# Altium PCB Acorn_AudioHybrid.pcbdoc
Units mm, origin at the board's own origin, x right, y up, seen from the top; angles counter-clockwise.
Board outline 48.26 x 12.45 mm, 2 copper layers (TopLayer, BottomLayer), stack 1.072 mm thick; 45 components, 29 nets, 121 pads, 21 vias.
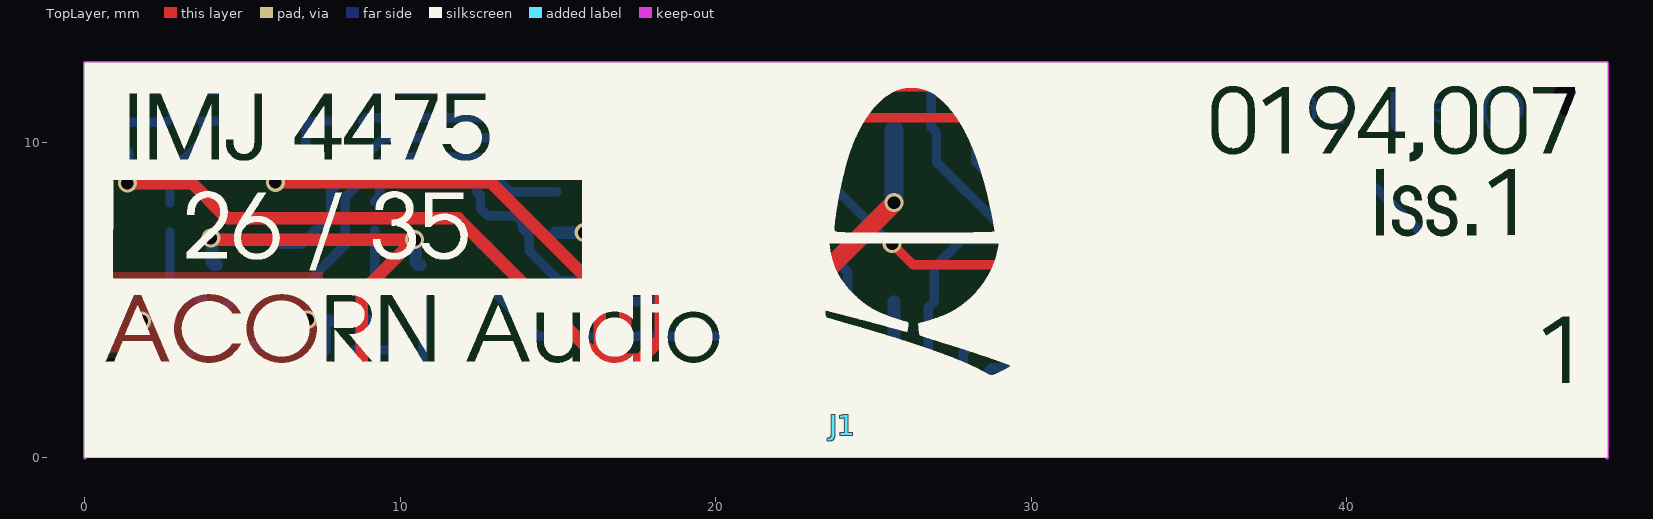
[diagram p0: TopLayer view]
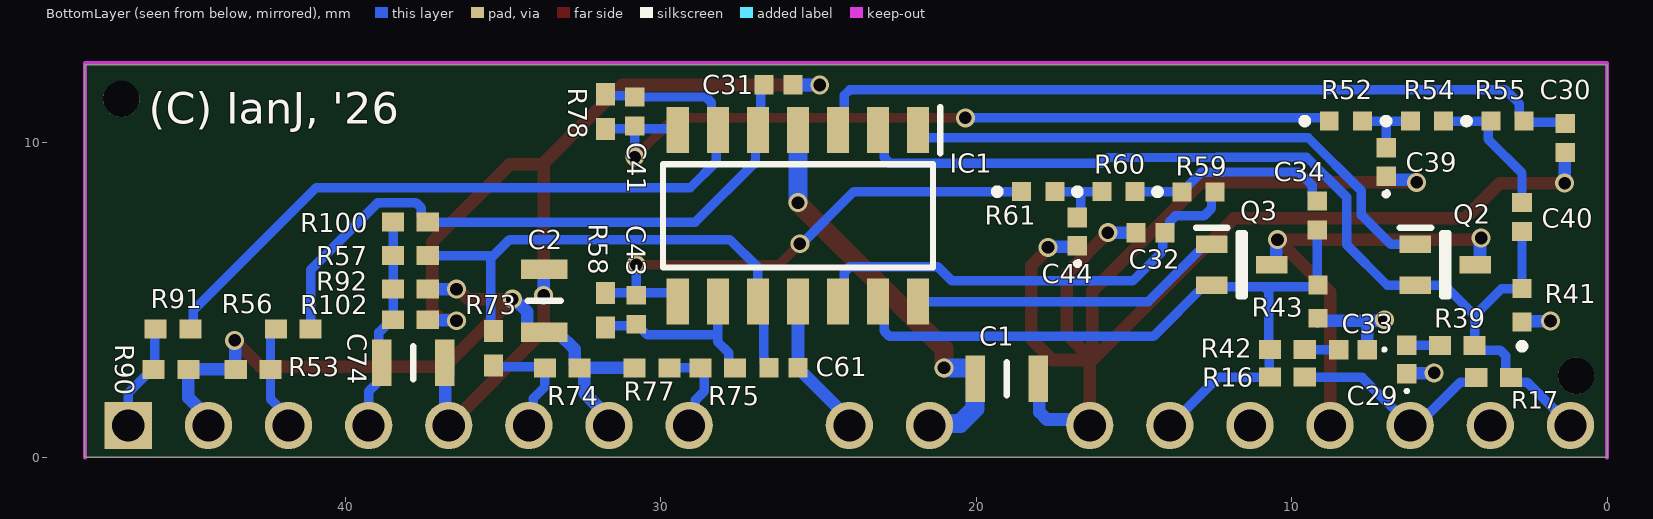
[diagram p1: BottomLayer view, seen from below]
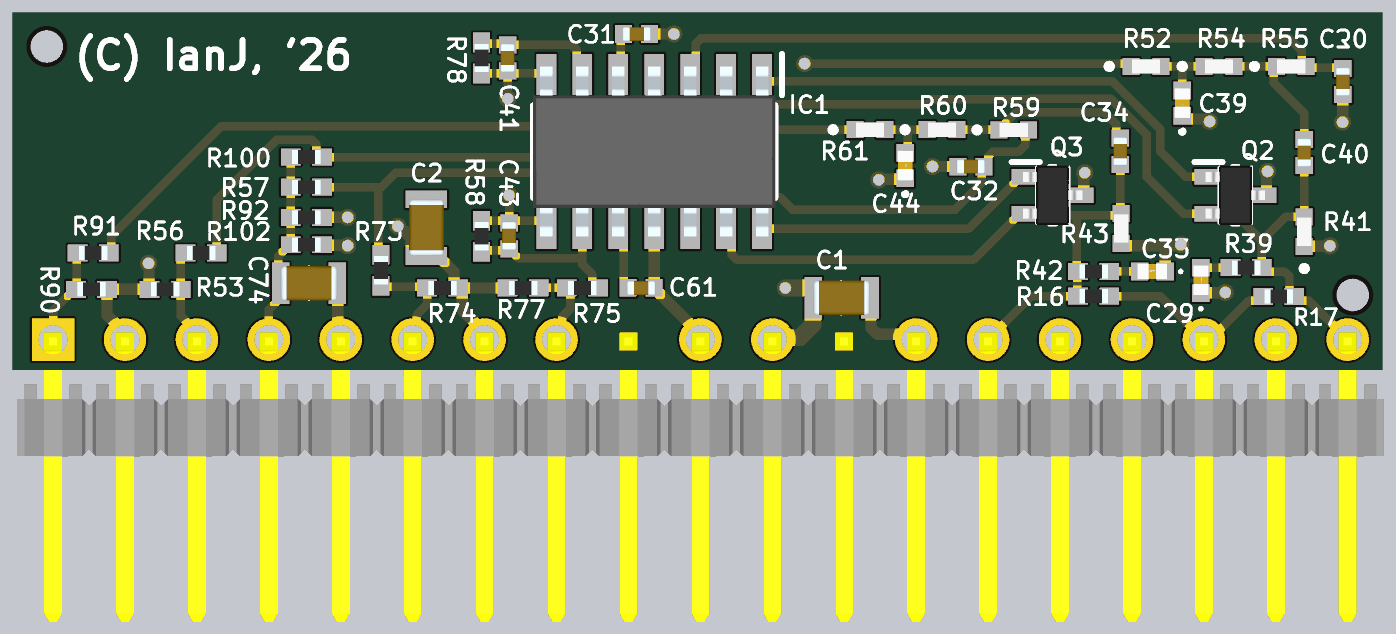
[diagram p2: 3D render of the assembled board from below, using the file's embedded part models]

## Layer stack, top to bottom
TopSolder: solder mask 0.01, Solder Resist, Dk 3.5
TopLayer: signal copper 0.036
Dielectric 2: core 1, Core-043, Dk 4.3
BottomLayer: signal copper 0.036
BottomSolder: solder mask 0.01, Solder Resist, Dk 3.5

## Board outline
0,12.446 0,0 48.26,0 48.26,12.446

## Design rules (kind name [scope] priority, off if disabled: settings)
BoardOutlineClearance [All] p1: gap=0.3 ignorepadtopadclearanceinfootprint=FALSE
Clearance [All] p1: gap=0.17 ignorepadtopadclearanceinfootprint=FALSE except(0.3: Via-Via; 0.5: Via-Hole)
ComponentClearance ComponentClearance_Z2_Z3 [(InComponent('Z2') OR InComponent('Z3')) vs InComponent('No Component')] p1: gap=0 collisioncheckmode=3 verticalgap=0 showdistances=FALSE
ComponentClearance ComponentClearance_U4_J104 [All] p2: gap=0 collisioncheckmode=3 verticalgap=0 showdistances=FALSE
ComponentClearance ComponentClearance_J3_J4 [InComponent('J3') vs InComponent('J4')] p3: gap=0 collisioncheckmode=3 verticalgap=0 showdistances=FALSE
ComponentClearance ComponentClearance_J103_J104 [InComponent('J103') vs InComponent('J104')] p4: gap=0 collisioncheckmode=3 verticalgap=0 showdistances=FALSE
ComponentClearance [All] p5: gap=0.254 collisioncheckmode=3 verticalgap=0.254 showdistances=FALSE
DiffPairsRouting [InDifferentialPairClass('All Differential Pairs')] p1: maxlimit=0.254 minlimit=0.17 mostfreqgap=0.17 toplayer_minwidth=0.2 toplayer_maxwidth=0.381 toplayer_prefwidth=0.237 bottomlayer_minwidth=0.2 bottomlayer_maxwidth=0.381 bottomlayer_prefwidth=0.237 maxuncoupledlength=12.7
FabricationTestPointUsage TestPointUsage [All] p1: valid=0 allowmultiple=FALSE
FabricationTestpoint Testpoint [All] p1: side=3 testpointundercomponent=TRUE minsize=1.016 maxsize=2.54 preferedsize=1.524 minholesize=0.508 maxholesize=1.016 preferedholesize=0.813 testpointgrid=0.025 allowsidetop=TRUE allowsidebottom=TRUE usegrid=TRUE gridtolerance=0
HoleSize [All] p1: absolutevalues=TRUE maxlimit=5 minlimit=0.4 maxpercent=80.000 minpercent=20.000
HoleToHoleClearance [All] p1: gap=0.25 allowstackedmicrovias=FALSE
MinimumSolderMaskSliver [All] p1: minsoldermaskwidth=0.02
PlaneClearance [All] p1: clearance=0.2
PlaneConnect [All] p1: pad.planeconnectstyle=Relief pad.reliefexpansion=0.508 pad.reliefentries=4 pad.reliefconductorwidth=0.254 pad.reliefairgap=0.254 via.planeconnectstyle=Direct via.reliefexpansion=0.508 via.reliefentries=4 via.reliefconductorwidth=0.254 via.reliefairgap=0.254
PolygonConnect [All] p1: thpad.connectstyle=Relief thpad.reliefconductorwidth=0.254 thpad.reliefentries=4 thpad.polygonreliefangle="90 Angle" thpad.airgapwidth=0.254 smdpad.connectstyle=Relief smdpad.reliefconductorwidth=0.254 smdpad.reliefentries=4 smdpad.polygonreliefangle="90 Angle" smdpad.airgapwidth=0.254 via.connectstyle=Direct via.reliefconductorwidth=0.254 via.reliefentries=4 via.polygonreliefangle="90 Angle" via.airgapwidth=0.254
RoutingVias [All] p1: holewidth=0.4 width=0.8 viastyle="Through Hole" minholewidth=0.4 minwidth=0.6 maxholewidth=0.4 maxwidth=0.8
SilkToSilkClearance [All] p1: silktosilkclearance=0.1
SilkToSolderMaskClearance SilkscreenOverComponentPads [IsPad] p1: minsilkscreentomaskgap=0.1 clearancetoexposedcopper=TRUE
SolderMaskExpansion [All] p1: expansion=0.075 istentingtop=FALSE
SupplyNets "Schematic Supply Nets_5" [InNet('GND5')] p1: voltage=0.000
SupplyNets "Schematic Supply Nets_4" [InNet('VCC12')] p2: voltage=0.000
SupplyNets "Schematic Supply Nets_3" [InNet('GND')] p3: voltage=0.000
SupplyNets "Schematic Supply Nets_2" [InNet('VCC5')] p4: voltage=0.000
SupplyNets "Schematic Supply Nets_1" [InNet('VCC')] p5: voltage=0.000
SupplyNets "Schematic Supply Nets" [InNet('Bias')] p6: voltage=0.000
Width [All] p1: maxlimit=5 minlimit=0.15 preferedwidth=0.2
19 further rules are at their usual default settings.

## Components (designator, comment, footprint, x,y, rotation, side; value= is the part's Value field where it differs from the comment)
C1 "33nF" CAPC2012X145N 19.035,2.494 r0 bottom
C2 "33nF" CAPC2012X145N 33.7,4.968 r270 bottom
C29 "47nF" C0402C104J4RACTU 6.35,3.106 r90 bottom
C30 "2n2" CAPC1005X55N 1.334,10.124 r90 bottom
C31 "2n2" CAPC1005X55N 26.274,11.809 r0 bottom
C32 "2n2" CAPC1005X55N 14.472,7.128 r180 bottom
C33 "47nF" C0402C104J4RACTU 8.061,3.422 r0 bottom
C34 "100nF" CAPC1005X55N 9.196,7.668 r270 bottom
C39 "22nF" C0402 7.01,9.364 r90 bottom
C40 "100nF" CAPC1005X55N 2.699,7.62 r270 bottom
C41 "2n2" CAPC1005X55N 30.832,10.964 r270 bottom
C43 "2n2" CAPC1005X55N 30.782,4.682 r90 bottom
C44 "22nF" C0402 16.794,7.158 r90 bottom
C61 "2n2" CAPC1005X55N 26.114,2.84 r0 bottom
C74 "33nF" CAPC2012X145N 37.846,3.005 r0 bottom
IC1 "LM324M" SOIC127P600X180-14N 25.654,7.658 r270 bottom value=LM324
J1 "TSW-119-08-L-S-RA" *SAMTEC_TSW-119-08-L-S-RA_TSW-119-08-L-S-RA(Primary) 46.884,1.016 r0 top
Q2 "BC849CW" SOT65P210X110-3N 5.13,6.112 r180 bottom
Q3 "BC849CW" SOT65P210X110-3N 11.586,6.112 r180 bottom
R16 "4k7" RESC1005X40N 10.136,2.548 r180 bottom
R17 "4k7" RESC1005X40N 3.599,2.54 r180 bottom
R39 "33R" RESC1005X40N 4.749,3.556 r180 bottom
R41 "56R" CRCW0402200KFKED 2.699,4.826 r90 bottom
R42 "33R" RESC1005X40N 10.136,3.422 r0 bottom
R43 "56R" CRCW0402200KFKED 9.163,4.939 r90 bottom
R52 "3K3" CRCW0402200KFKED 8.286,10.664 r180 bottom
R53 "1K" RESC1005X40N 42.926,2.794 r0 bottom
R54 "3K3" CRCW0402200KFKED 5.71,10.664 r180 bottom
R55 "3K3" CRCW0402200KFKED 3.159,10.664 r180 bottom
R56 "22k1" RESC1005X40N 41.656,4.076 r180 bottom
R57 "22k1" RESC1005X40N 37.94,6.398 r180 bottom
R58 "22k1" RESC1005X40N 31.75,4.666 r270 bottom
R59 "3K3" CRCW0402200KFKED 12.955,8.42 r180 bottom
R60 "3K3" CRCW0402200KFKED 15.494,8.428 r180 bottom
R61 "3K3" CRCW0402200KFKED 18.035,8.428 r180 bottom
R73 "22k1" RESC1005X40N 35.306,3.465 r90 bottom
R74 "1K" RESC1005X40N 33.128,2.84 r180 bottom
R75 "22k1" RESC1005X40N 28.194,2.84 r180 bottom
R77 "1K" RESC1005X40N 30.282,2.84 r0 bottom
R78 "22k1" RESC1005X40N 31.75,10.964 r90 bottom
R90 "1K" RESC1005X40N 45.528,2.794 r180 bottom
R91 "22k1" RESC1005X40N 45.466,4.076 r180 bottom
R92 "4K3" RESC1005X40N 37.94,5.334 r180 bottom
R100 "22k1" RESC1005X40N 37.94,7.462 r180 bottom
R102 "22k1" RESC1005X40N 37.94,4.366 r180 bottom

## Footprints (in the part's own frame and the unit in brackets; to place one, negate y for a bottom-side part, rotate by r counter-clockwise, add the part's x,y. Pads: shape width x height; smd on the part's side, far side on the other; paste and mask are expansions set on the pad)
*SAMTEC_TSW-119-08-L-S-RA_TSW-119-08-L-S-RA(Primary) [mm]
  rect 1.5x1.5 hole 1.02: 01(0,0)
  round 1.5 hole 1.02: 02(-2.54,0) 03(-5.08,0) 04(-7.62,0) 05(-10.16,0) 06(-12.7,0) 07(-15.24,0) 08(-17.78,0) 10(-22.86,0) 11(-25.4,0) 13(-30.48,0) 14(-33.02,0) 15(-35.56,0) 16(-38.1,0) 17(-40.64,0) 18(-43.18,0) 19(-45.72,0)
  body extent -46.99,-9.97 1.27,0.25, height 1.78
C0402 [mm]
  rect 0.62x0.62 smd: 1(-0.45,0) 2(0.45,0)
  silkscreen extent -1.05,-0.05 -0.96,0.05, body extent -0.52,-0.28 0.53,0.27, height 0.55
C0402C104J4RACTU [mm]
  rect 0.62x0.62 smd: 1(-0.45,0) 2(0.45,0)
  silkscreen extent -1.05,-0.05 -0.95,0.05, body extent -0.52,-0.28 0.53,0.27, height 0.55
CAPC1005X55N [mm]
  rect 0.6x0.62 smd: 1(-0.46,0) 2(0.46,0)
  body extent -0.5,-0.25 0.5,0.25, height 0.55
CAPC2012X145N [mm]
  rect 0.62x1.47 smd: 1(-1,0) 2(1,0)
  silkscreen extent 0,-0.53 0,0.53, body extent -1,-0.63 1,0.63, height 1.45
CRCW0402200KFKED [mm]
  rect 0.6x0.6 smd: 1(-0.525,0) 2(0.525,0)
  silkscreen extent -1.4,-0.1 -1.2,0.1, body extent -0.5,-0.25 0.5,0.25, height 0.35
RESC1005X40N [mm]
  rect 0.7x0.6 smd: 1(-0.55,0) 2(0.55,0)
  body extent -0.5,-0.25 0.5,0.25, height 0.4
SOIC127P600X180-14N [mm]
  rect 1.462x0.7 smd: 1(-2.719,3.81) 2(-2.719,2.54) 3(-2.719,1.27) 4(-2.719,0) 5(-2.719,-1.27) 6(-2.719,-2.54) 7(-2.719,-3.81) 8(2.719,-3.81) 9(2.719,-2.54) 10(2.719,-1.27) 11(2.719,0) 12(2.719,1.27) 13(2.719,2.54) 14(2.719,3.81)
  silkscreen extent -3.45,-4.28 1.64,4.51, body extent -3,-4.28 3,4.28, height 1.8
SOT65P210X110-3N [mm]
  rect 1x0.55 smd: 1(-0.95,0.65) 2(-0.95,-0.65) 3(0.95,0)
  silkscreen extent -1.45,-1 0.1,1.17, body extent -1.05,-1.05 1.05,1.05, height 0.95

## Part data
C1 C2 C74: library part C2012C0G1H333J125AA, "Capacitor", Manufacturer_Name=TDK, Mouser Part Number=810-C2012C0G1H333J, Arrow Part Number=C2012C0G1H333J125AA, Arrow Price/Stock=https://www.arrow.com/en/products/c2012c0g1h333j125aa/tdk, Datasheet Link=https://product.tdk.com/info/en/catalog/datasheets/mlcc_commercial_midvoltage_en.pdf, Height=1.45mm, Manufacturer_Part_Number=C2012C0G1H333J125AA, Mouser Price/Stock=https://www.mouser.co.uk/ProductDetail/TDK/C2012C0G1H333J125AA?qs=NRhsANhppD%252B9iusLcop9UA%3D%3D
C29 C33: library part C0402C473K3RECTU, "Capacitor", Manufacturer_Name="Yageo Group", Mouser Part Number=80-C0402C473K3RECTU, Datasheet Link=https://content.kemet.com/datasheets/KEM_C1002_X7R_SMD.pdf, Height=0.55mm, Manufacturer_Part_Number=C0402C473K3RECTU, Mouser Price/Stock=https://www.mouser.co.uk/ProductDetail/KEMET/C0402C473K3RECTU?qs=55YtniHzbhBsOkATuUUh6g%3D%3D
C30 C31 C32 C41 C43 C61: library part CGA2B3X7R1H223K050BB, "Capacitor", Manufacturer_Name=TDK, Mouser Part Number=810-CGA2B3X7R1H223K, Arrow Part Number=CGA2B3X7R1H223K050BB, Arrow Price/Stock=https://www.arrow.com/en/products/cga2b3x7r1h223k050bb/tdk?region=nac, Datasheet Link=http://docs-europe.electrocomponents.com/webdocs/14e9/0900766b814e9125.pdf, Height=0.55mm, Manufacturer_Part_Number=CGA2B3X7R1H223K050BB, Mouser Price/Stock=https://www.mouser.co.uk/ProductDetail/TDK/CGA2B3X7R1H223K050BB?qs=NRhsANhppD8qn5SyO3ZPFg%3D%3D
C34 C40: library part CL05B104KP5VPNC, "Capacitor", Manufacturer_Name=SAMSUNG, Mouser Part Number=187-CL05B104KP5VPNC, Datasheet Link=https://product.samsungsem.com/mlcc/CL05B104KP5VPN.do, Height=0.55mm, Manufacturer_Part_Number=CL05B104KP5VPNC, Mouser Price/Stock=https://www.mouser.co.uk/ProductDetail/Samsung-Electro-Mechanics/CL05B104KP5VPNC?qs=gqBM4hNBiUXTv%252BkFO9q2pQ%3D%3D
C39 C44: library part C0402C223K5REC7411, "Capacitor", Manufacturer_Name="Yageo Group", Mouser Part Number=80-C0402C223K5RECLR, Arrow Part Number=C0402C223K5REC7411, Arrow Price/Stock=null?region=nac, Datasheet Link=https://content.kemet.com/datasheets/KEM_C1090_X7R_ESD.pdf, Height=0.55mm, Manufacturer_Part_Number=C0402C223K5REC7411, Mouser Price/Stock=https://www.mouser.co.uk/ProductDetail/KEMET/C0402C223K5REC7411?qs=55YtniHzbhAnXT3aE9sn1g%3D%3D
IC1: library part LM324
J1: "None", Availability=Unavailable, MF="Samtec Inc.", MP=TSW-119-08-L-S-RA, Package=None, Price=None
Q2 Q3: "Transistor BJT NPN", Manufacturer_Name=Nexperia, Mouser Part Number=N/A, Datasheet Link=https://assets.nexperia.com/documents/data-sheet/BC849W_850W.pdf, Height=1.1mm, Manufacturer_Part_Number=BC849CW, Mouser Price/Stock=https://www.mouser.com/Search/Refine.aspx?Keyword=N%2FA
R16 R17 R102: library part CRCW04024K70FKED, "Resistor", Manufacturer_Name=Vishay, Mouser Part Number=71-CRCW0402-4.7K-E3, Arrow Part Number=CRCW04024K70FKED, Arrow Price/Stock=https://www.arrow.com/en/products/crcw04024k70fked/vishay?region=nac, Datasheet Link=http://www.vishay.com/docs/20035/dcrcwe3.pdf, Height=0.4mm, Manufacturer_Part_Number=CRCW04024K70FKED, Mouser Price/Stock=https://www.mouser.co.uk/ProductDetail/Vishay-Dale/CRCW04024K70FKED?qs=Jz%252BxJjKhzTxI08uguE%252B9mA%3D%3D
R39 R42: library part CRCW040233R0FKED, "Resistor", LCSC Part #=C137880, Manufacturer_Name=Vishay, Mouser Part Number=71-CRCW0402-33-E3, Arrow Part Number=CRCW040233R0FKED, Arrow Price/Stock=https://www.arrow.com/en/products/crcw040233r0fked/vishay, Datasheet Link=http://www.vishay.com/docs/20035/dcrcwe3.pdf, Height=0.4mm, Manufacturer_Part_Number=CRCW040233R0FKED, Mouser Price/Stock=https://www.mouser.co.uk/ProductDetail/Vishay-Dale/CRCW040233R0FKED?qs=TNtMkGKFKOyo77UGFlXIJw%3D%3D
R41 R43: library part CRCW040256R2FKED, "Resistor", Manufacturer_Name=Vishay, Mouser Part Number=71-CRCW0402-56.2-E3, Datasheet Link=http://www.vishay.com/docs/20035/dcrcwe3.pdf, Height=0.4mm, Manufacturer_Part_Number=CRCW040256R2FKED, Mouser Price/Stock=https://www.mouser.com/Search/Refine.aspx?Keyword=71-CRCW0402-56.2-E3
R52 R54 R55 R59 R60 R61: library part CRCW04023K30FKED, "Resistor", Manufacturer_Name=Vishay, Mouser Part Number=71-CRCW0402-3.3K-E3, Arrow Part Number=CRCW04023K30FKED, Arrow Price/Stock=https://www.arrow.com/en/products/crcw04023k30fked/vishay.html?utm_currency=USD&region=nac, Datasheet Link=http://www.vishay.com/docs/20035/dcrcwe3.pdf, Height=0.4mm, Manufacturer_Part_Number=CRCW04023K30FKED, Mouser Price/Stock=https://www.mouser.co.uk/ProductDetail/Vishay-Dale/CRCW04023K30FKED?qs=iv%252Be0Bc5VY2uvlCcTQHBWQ%3D%3D
R53 R74 R77 R90: library part RC0402FR-7W1KL, "Resistor", Manufacturer_Name=KEMET, Mouser Part Number=603-RC0402FR-7W1KL, Arrow Part Number=RC0402FR-7W1KL, Arrow Price/Stock=https://www.arrow.com/en/products/rc0402fr-7w1kl/yageo, Datasheet Link=http://www.yageo.com/documents/recent/PYu-RC0402_51_RoHS_L_6_r.pdf, Height=0.4mm, Manufacturer_Part_Number=RC0402FR-7W1KL, Mouser Price/Stock=https://www.mouser.co.uk/ProductDetail/Yageo/RC0402FR-7W1KL?qs=AQlKX63v8Rtb3IVppNQWPg%3D%3D
R56 R57 R58 R73 R75 R78 R91 R100: library part CRCW040222K1FKED, "Resistor", Manufacturer_Name=Vishay, Mouser Part Number=71-CRCW0402-22.1K-E3, Arrow Part Number=CRCW040222K1FKED, Arrow Price/Stock=https://www.arrow.com/en/products/crcw040222k1fked/vishay, Datasheet Link=http://www.vishay.com/docs/20035/dcrcwe3.pdf, Height=0.4mm, Manufacturer_Part_Number=CRCW040222K1FKED, Mouser Price/Stock=https://www.mouser.co.uk/ProductDetail/Vishay-Dale/CRCW040222K1FKED?qs=oYI6rOI5zkv%2FV1tTZIsV7A%3D%3D
R92: library part RC0402FR-0710KP, "Resistor", Manufacturer_Name=KEMET, Mouser Part Number=603-RC0402FR-0710KP, Arrow Part Number=RC0402FR-0710KP, Arrow Price/Stock=https://www.arrow.com/en/products/rc0402fr-0710kp/yageo?region=nac, Datasheet Link=https://componentsearchengine.com/Datasheets/2/RC0402FR-0710KP.pdf, Height=0.4mm, Manufacturer_Part_Number=RC0402FR-0710KP, Mouser Price/Stock=https://www.mouser.co.uk/ProductDetail/YAGEO/RC0402FR-0710KP?qs=oypCK0zG325Ov8hhvMZZMg%3D%3D

## Free pads (board coordinates)
  round 1.152 hole 1.152 unplated mask+0.148: Tool(0.984,2.59) Tool(47.107,11.368)

## Via types
v1: diameter 0.6, hole 0.4, TopLayer to BottomLayer, tented both sides, 21 vias

## Nets (pads, with @x,y where several pads share a name; then routed paths per layer and width w, separated by ;. In a path a pad name is that pad's centre, name@x,y a point inside that pad or via, vN(x,y) a via of type N, cw(c..) or ccw(c..) an arc to the next point about the centre after c; other vN are vias at no path point)
Bias: C74.2 J1.04 R57.1 R92.1 R100.1 R102.1 | length 6.7
  BottomLayer w0.3: R102.1 R92.1 R57.1 R100.1 ; R102.1@38.54,4.366 38.94,3.966 38.94,2.84 38.94,2.415 39.264,2.091 J1.04
GND: C1.1 C2.1 C30.1 C31.1 C32.1 C39.1 C44.1 C61.1 C74.1 IC1.11 J1.05 J1.10 J1.13 J1.15 R102.2 | length 86.9
  TopLayer w0.4: v1(1.346,8.695) 3.396,8.695 4.514,7.578 11.831,7.578 16.319,3.09 ; v1(6.04,8.72) 12.88,8.72 16.319,5.281 16.319,3.09 ; v1(15.827,7.128) 17.131,5.825 17.131,3.902 16.319,3.09 ; J1.13 16.404,3.005 16.319,3.09 ; v1(17.725,6.659) 17.725,6.605 18.26,6.07 18.26,3.764 17.586,3.09 16.319,3.09 ; v1(24.962,11.809) 31.233,11.809 33.716,9.326 ; v1(36.48,4.334) 36.518,4.372 36.972,4.372 37.25,4.65 37.25,6.828 34.782,9.296 33.746,9.296 33.716,9.326 ; J1.05 33.716,4.024 v1(33.716,5.142) 33.716,9.326
  BottomLayer w0.4: C30.1 1.34,9.658 1.34,8.701 v1(1.346,8.695) ; v1(6.04,8.72) 6.094,8.72 6.178,8.804 6.9,8.804 C39.1 ; J1.15 J1.15@11.324,1.026 ; C32.1 v1(15.827,7.128) ; J1.13 16.59,1.202 17.765,1.202 18,1.436 18,2.459 C1.1 ; C44.1 16.819,6.683 17.7,6.683 v1(17.725,6.659) ; J1.10 24.024,1.2 25.654,2.83 C61.1 IC1.11 ; v1(24.962,11.809) C31.1 ; C2.1 33.716,5.952 v1(33.716,5.142) ; v1(36.48,4.334) 36.496,4.35 37.324,4.35 R102.2@37.34,4.366 ; J1.05 36.832,1.124 C74.1@36.832,2.718 ; C74.1@36.74,3.196 36.74,2.626 C74.1@36.832,2.718 ; C74.1@36.832,2.732 C74.1@36.832,2.718
GND5: C29.1 C33.1 J1.18 R41.1 R43.1 | length 4.9
  BottomLayer w0.4: v1(1.795,4.326) 1.808,4.314 2.687,4.314 R41.1 ; v1(5.487,2.681) 5.5,2.669 6.337,2.669 C29.1 ; v1(7.06,4.366) 7.092,4.334 7.561,4.334 ; C33.1 7.611,4.284 7.561,4.334 ; R43.1@9.196,4.301 9.163,4.334 7.561,4.334
LeftN: J1.03 R53.1 R56.1 | length 3.4
  BottomLayer w0.3: J1.03 41.804,1.278 42.376,1.85 R53.1 42.376,3.926 42.226,4.076 R56.1
LeftOut: C40.2 IC1.2 J1.19 Q2.2 R17.2 R39.2 R41.2 | length 31.8
  BottomLayer w0.3: J1.19 2.538,2.39 2.899,2.39 R17.2 3.07,2.54 3.22,2.69 3.22,3.23 3.395,3.406 4.049,3.406 R39.2 4.199,4.501 ; C40.2 R41.2 3.349,5.351 4.199,4.501 ; IC1.2 22.914,10.177 22.914,9.502 22.738,9.326 16.013,9.326 15.829,9.51 12.379,9.51 12.369,9.52 9.525,9.52 8.26,8.255 8.26,6.751 6.971,5.462 Q2.2 5.16,5.462 4.199,4.501
LeftP: J1.01 R90.1 R91.1 | length 3.4
  BottomLayer w0.3: R91.1 46.047,4.045 46.047,2.825 R90.1 46.128,2.794 46.884,2.038 J1.01
LeftRaw: C41.2 IC1.7 R52.1 R78.1 | length 25.9
  TopLayer w0.3: v1(20.345,10.764) 29.584,10.764 v1(30.828,9.52)
  BottomLayer w0.3: R52.1 8.911,10.764 v1(20.345,10.764) ; IC1.7 29.501,10.414 R78.1 ; v1(30.828,9.52) 30.83,9.522 30.83,10.502 C41.2
MonoOut: J1.17 R16.2 R17.1 | length 6.7
  BottomLayer w0.3: R17.1 4.299,2.39 4.649,2.39 6.023,1.016 J1.17 7.768,2.54 R16.2@9.61,2.54
NetC29_2: C29.2 R39.1 | length 1.1
  BottomLayer w0.3: R39.1 C29.2
NetC30_2: C30.2 IC1.3 R55.2 | length 24.6
  BottomLayer w0.3: C30.2 1.374,10.624 2.594,10.624 R55.2 ; R55.2@2.784,10.814 2.784,11.217 3.225,11.658 24.008,11.658 24.184,11.482 24.184,10.577 IC1.3
NetC31_2: C31.2 IC1.5 R56.2 R100.2 | length 20.6
  BottomLayer w0.3: C31.2 26.829,11.714 26.829,10.472 26.999,10.302 26.999,9.372 28.909,7.462 R100.2 ; R100.2@37.44,7.462 37.59,7.612 37.59,7.906 37.765,8.082 38.972,8.082 41.106,5.948 R56.2
NetC32_2: C32.2 IC1.12 R59.2 | length 14.8
  BottomLayer w0.3: R59.2 12.543,8.307 12.543,7.897 12.782,7.658 13.686,7.658 13.862,7.482 13.862,7.278 14.085,7.055 14.085,6.555 15.042,5.598 20.774,5.598 21.216,6.04 24.016,6.04 24.192,5.864 24.192,5.131 IC1.12
NetC33_2: C33.2 R42.1 | length 1.1
  BottomLayer w0.3: C33.2 R42.1@9.561,3.422
NetC34_1: C34.1 R59.1 R60.2 | length 6.6
  BottomLayer w0.3: C34.1 9.346,8.278 9.346,8.624 9.772,9.05 12.175,9.05 12.185,9.04 12.863,9.04 13.33,8.573 13.33,8.57 13.472,8.428 R60.2
NetC39_2: C39.2 R52.2 R54.1 | length 2.4
  BottomLayer w0.3: R54.1 7.01,10.664 ; C39.2 7.01,10.664 ; R52.2 7.01,10.664
NetC40_1: C40.1 R54.2 R55.1 | length 4.6
  BottomLayer w0.3: C40.1 2.699,9.014 3.775,10.09 3.775,10.573 R55.1 R54.2
NetC41_1: C41.1 IC1.6 R78.2 R91.2 | length 24.6
  BottomLayer w0.3: R78.2 31.705,11.469 30.877,11.469 C41.1 30.828,11.428 28.57,11.428 28.394,11.252 28.394,10.577 IC1.6 28.249,10.322 28.249,9.372 29.069,8.552 40.93,8.552 44.832,4.65 44.832,4.16 R91.2
NetC43_1: C43.1 IC1.9 R58.2 R75.2 | length 6.1
  BottomLayer w0.3: R75.2 27.694,2.84 27.844,2.99 27.844,3.315 28.194,3.665 28.194,3.958 ; IC1.9 28.194,3.958 ; R58.2 31.697,4.169 30.835,4.169 C43.1 30.772,4.222 30.438,3.888 28.264,3.888 28.194,3.958
NetC44_2: C44.2 R60.1 R61.2 | length 2.4
  BottomLayer w0.3: R60.1 16.694,8.428 ; C44.2 16.694,7.708 16.694,8.428 ; R61.2 16.694,8.428
NetC61_2: C61.2 IC1.10 R57.2 R73.2 | length 16.8
  BottomLayer w0.3: C61.2 26.724,2.99 26.724,3.166 26.734,3.176 26.734,4.749 IC1.10 26.924,6.018 27.814,6.908 34.796,6.908 35.306,6.398 R57.2 ; R73.2 35.398,4.107 35.398,6.398
NetIC1_1: IC1.1 Q2.1 | length 17.7
  BottomLayer w0.3: Q2.1 6.867,6.762 7.79,7.685 7.79,8.449 9.474,10.134 21.644,10.134 21.844,10.334 IC1.1
NetIC1_14: IC1.14 Q3.1 | length 10.1
  BottomLayer w0.3: Q3.1 12.761,6.762 12.836,6.687 12.836,6.659 14.555,4.939 IC1.14
RightN: J1.06 R73.1 R74.1 | length 3.7
  BottomLayer w0.3: J1.06 34.041,1.159 34.041,1.878 33.678,2.24 R74.1 33.716,2.877 35.268,2.877 R73.1
RightOut: C34.2 IC1.13 J1.14 Q3.2 R16.1 R42.2 R43.2 | length 24.1
  BottomLayer w0.3: C34.2 9.196,5.351 9.251,5.406 10.726,5.406 10.866,5.406 ; J1.14 12.34,2.54 10.71,2.54 10.718,2.548 10.718,3.548 10.726,3.556 10.726,5.266 10.866,5.406 ; IC1.13 22.922,4.747 22.922,4.014 22.746,3.838 14.385,3.838 12.761,5.462 Q3.2 12.48,5.406 10.866,5.406
RightP: J1.08 R75.1 R77.1 | length 3.1
  BottomLayer w0.3: J1.08 28.904,1.216 28.904,1.821 28.62,2.106 28.62,2.716 R75.1 R77.1
RightRaw: C43.2 IC1.8 R58.1 R61.1 | length 16.7
  TopLayer w0.3: v1(25.593,6.776) 26.257,6.112 v1(30.782,6.112)
  BottomLayer w0.3: R61.1 23.884,8.428 v1@25.654,6.658 ; IC1.8 29.464,5.016 29.664,5.216 R58.1 ; C43.2 v1(30.782,6.112)
VCC: C2.2 J1.02 J1.07 R53.2 R74.2 R77.2 R90.2 R92.2 | length 24.6
  TopLayer w0.4: v1(36.48,5.334) 36.425,5.334 36.111,5.019 v1(34.708,5.019) 36.85,2.877 42.695,2.877 v1@43.476,3.658
  BottomLayer w0.4: R77.2 R74.2 ; J1.07 31.644,1.265 32.428,2.049 32.428,2.74 R74.2@32.528,2.84 ; R74.2@32.728,2.94 32.728,3.422 33.275,3.968 C2.2 34.125,3.968 34.235,4.078 34.235,4.613 34.5,4.878 34.513,4.878 34.654,5.019 v1(34.708,5.019) ; v1(36.48,5.334) R92.2 ; v1(43.513,3.712) 43.495,3.693 43.495,2.813 R53.2 R90.2 44.978,1.894 44.344,1.26 J1.02
VCC5: J1.16 Q2.3 Q3.3 | length 14.9
  TopLayer w0.4: v1(3.994,6.958) 4.032,6.919 4.174,6.919 4.185,6.908 v1(10.449,6.908) 8.784,5.243 J1.16
  BottomLayer w0.4: v1(3.994,6.958) 4.032,6.919 4.032,6.187 4.107,6.112 Q2.3 ; v1(10.449,6.908) 10.487,6.87 10.487,6.187 10.562,6.112 Q3.3
VCC12: C1.2 IC1.4 J1.11 | length 13.4
  TopLayer w0.6: v1(21.024,2.84) 21.024,3.45 v1(25.654,8.08)
  BottomLayer w0.6: v1(21.024,2.84) 20.045,2.84 20.035,2.83 C1.2 20.045,2.484 20.045,1.545 20.508,1.082 21.418,1.082 J1.11 ; v1(25.654,8.08) IC1.4

## Polygon pours and split planes (outlines as drawn)
GND5 on TopLayer "NONET_L-01_P-001" (solid, remove dead copper, pour order 1): 0,0 7.535,0 7.535,5.864 0,5.864
GND on TopLayer "NONET_L-01_P-001" (solid, remove dead copper, pour order 0): 48.26,0 10.136,0 10.136,1.906 10.545,2.315 48.143,2.315

## Keep-outs
KeepOutLayer:
  lines w0.127: 0.001,0.001 0.001,12.509 0.002,12.51 48.26,12.51 48.261,12.509 48.261,0.001 48.26,0

## Other copper
BottomLayer:
  text "(C) IanJ, '26" at 46.228,10.587 h1

## Silkscreen, mask and mechanical layers (free items; w line width, h text height)
TopOverlay:
  drawing of 19 lines, arcs and shapes, not listed
BottomOverlay:
  text "(C) IanJ, '26" at 46.228,10.587 h1
Mechanical3:
  lines w0.127: 48.26,12.51 0.002,12.51 0.002,0.002 48.26,0.002 48.26,12.51 ; 48.26,12.51 48.26,12.51